# Altium PCB Glucometer-I.C.- RF Module.PcbDoc
Units mm, origin at the board's own origin, x right, y up, seen from the top; angles counter-clockwise.
Board outline 26.75 x 29.45 mm, 2 copper layers (Top Layer, Bottom Layer); 2 components, 9 nets, 21 pads, 0 vias.
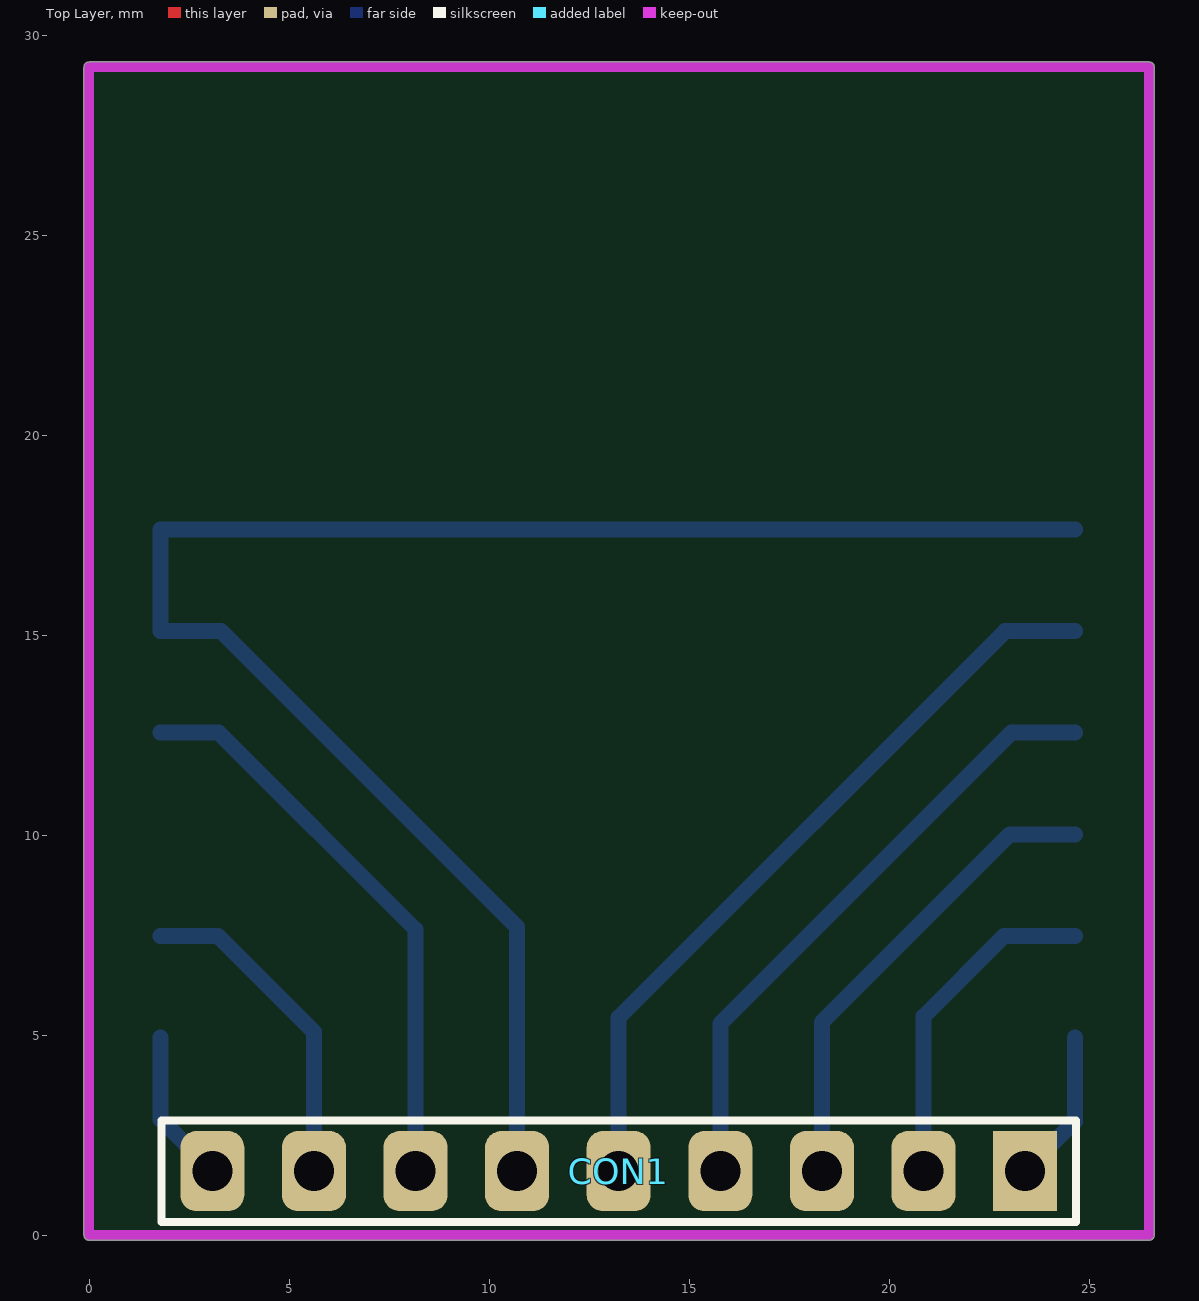
[diagram p0: Top Layer view]
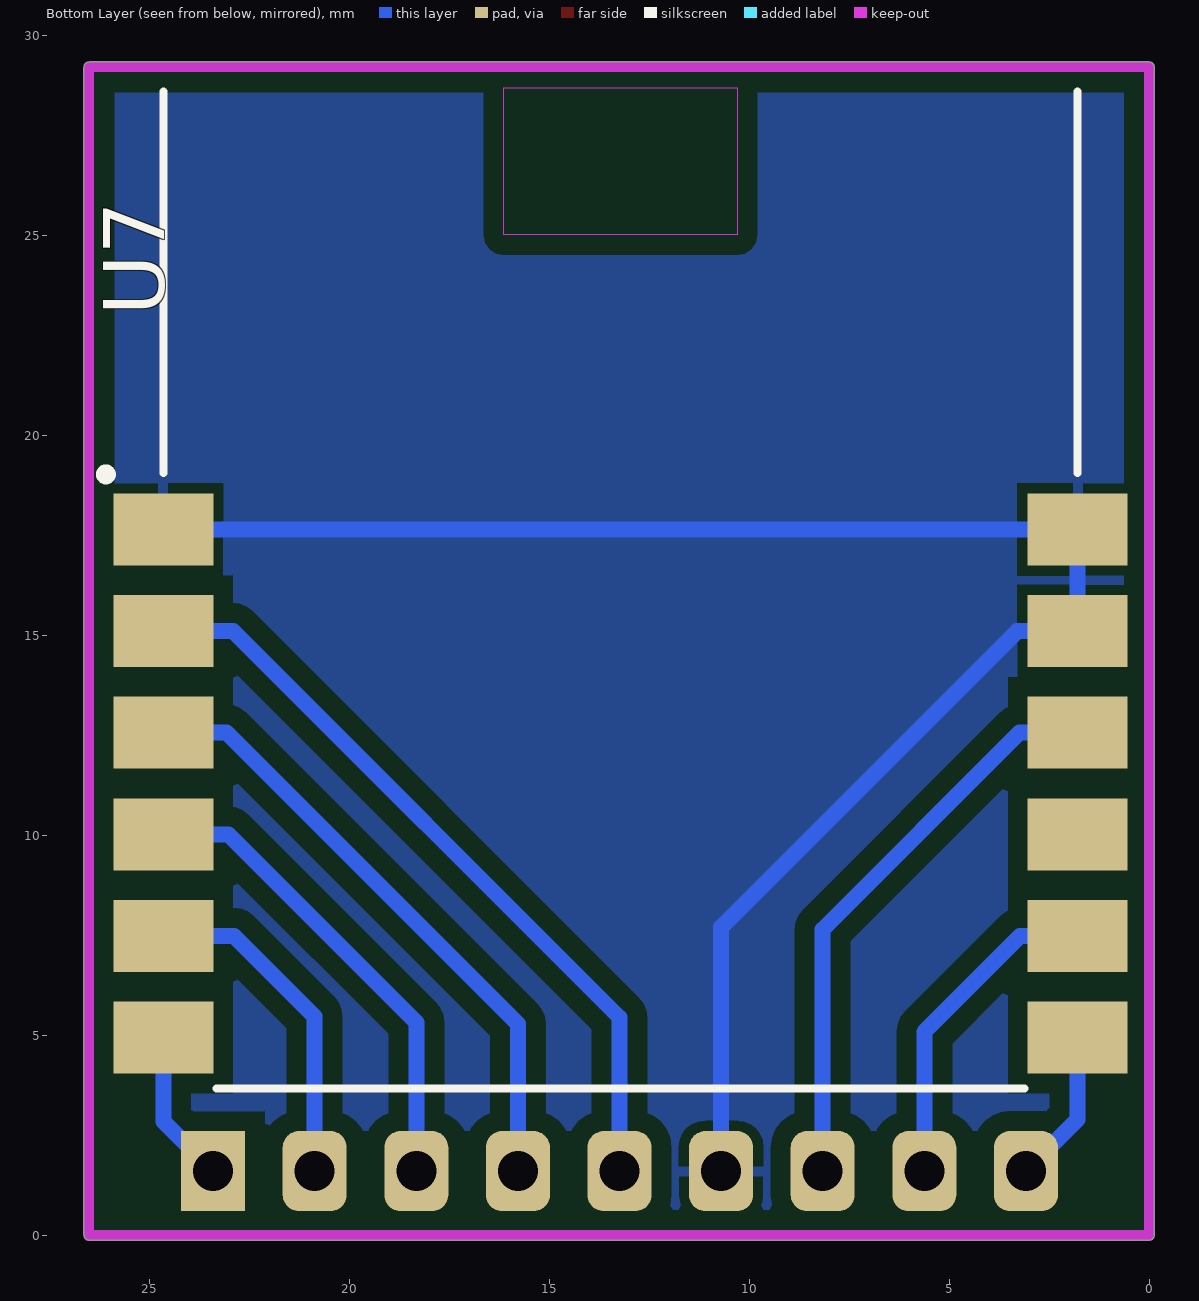
[diagram p1: Bottom Layer view, seen from below]

## Layer stack, top to bottom
Top Layer: signal copper 0.0356
Dielectric: dielectric 0.32, FR-4, Dk 4.8
Bottom Layer: signal copper 0.0356

## Board outline
-0.127,0 ccw(c0,0) 0,-0.127 26.5,-0.127 ccw(c26.5,0) 26.627,0 26.627,29.2 ccw(c26.5,29.2) 26.5,29.327 0,29.327 ccw(c0,29.2) -0.127,29.2

## Design rules (kind name [scope] priority, off if disabled: settings)
Clearance [All] p1: gap=0.3
PolygonConnect [All] p1: connectstyle=Relief reliefconductorwidth=0.254 reliefentries=4 polygonreliefangle="90 Angle" airgapwidth=0.254
RoutingVias [All] p1: holewidth=0.711 width=1.27 viastyle="Through Hole" minholewidth=0.711 minwidth=1.27 maxholewidth=0.711 maxwidth=1.27
SolderMaskExpansion [All] p1: expansion=0.102
Width [All] p1: maxlimit=5 minlimit=0.25 preferedwidth=0.3 minimp=50.000000 maximp=50.000000 favimp=50.000000
28 further rules are at their usual default settings.

## Components (designator, comment, footprint, x,y, rotation, side; value= is the part's Value field where it differs from the comment)
CON1 "Header 9" HDR1X9 23.4,1.6 r180 top
U7 "MRF24J40MB-I/RM" MRF24J40MB 13.216,28.688 r180 bottom

## Footprints (in the part's own frame and the unit in brackets; to place one, negate y for a bottom-side part, rotate by r counter-clockwise, add the part's x,y. Pads: shape width x height; smd on the part's side, far side on the other; paste and mask are expansions set on the pad)
HDR1X9 [mm] "Connector; Header; 9 Position"
  rect 1.6x2 hole 1: 1(0,0)
  rrect50% 1.6x2 hole 1: 2(2.54,0) 3(5.08,0) 4(7.62,0) 5(10.16,0) 6(12.7,0) 7(15.24,0) 8(17.78,0) 9(20.32,0)
  silkscreen extent -1.27,-1.27 21.59,1.27
MRF24J40MB [mm] "SM Module; 12 Leads; Body 33x22.9x2.5mm (LxWxH), Microchip Recommended"
  rect 2.5x1.8 smd paste-4.05 mask+0.051: 1(-11.43,-11.049) 2(-11.43,-13.589) 3(-11.43,-16.129) 4(-11.43,-18.669) 5(-11.43,-21.209) 6(-11.43,-23.749) 7(11.43,-23.749) 8(11.43,-21.209) 9(11.43,-18.669) 10(11.43,-16.129) 11(11.43,-13.589) 12(11.43,-11.049)
  Top Layer keep-out region: -2.921,0 2.921,0 2.921,-3.683 -2.921,-3.683
  silkscreen extent -12.99,-25.02 11.43,-0.1, body extent -11.43,-25.02 11.43,8, height 2.54

## Part data
CON1: "Header, 9-Pin"
U7: "2.4 GHz IEEE Std. 802.15.4, 20 dBm RF Transceiver 12-Pin Module, Industrial Temperature"

## Nets (pads, with @x,y where several pads share a name; then routed paths per layer and width w, separated by ;. In a path a pad name is that pad's centre, name@x,y a point inside that pad or via, vN(x,y) a via of type N, cw(c..) or ccw(c..) an arc to the next point about the centre after c; other vN are vias at no path point)
3.3V: CON1.7 U7.10 | length 14.5
  Bottom Layer w0.4: U7.10 3.241,12.559 8.16,7.64 CON1.7
GND: CON1.6 U7.1 U7.11 U7.12 | length 43.5
  Bottom Layer w0.4: CON1.6 10.7,7.7 3.301,15.099 U7.11 U7.12 U7.1
NetCON1_1: CON1.1 U7.6 | length 3.9
  Bottom Layer w0.4: CON1.1 24.646,2.846 U7.6
NetCON1_2: CON1.2 U7.5 | length 8.5
  Bottom Layer w0.4: CON1.2 20.86,5.46 22.879,7.479 U7.5
NetCON1_3: CON1.3 U7.4 | length 12
  Bottom Layer w0.4: CON1.3 18.32,5.32 23.019,10.019 U7.4
NetCON1_4: CON1.4 U7.3 | length 15.6
  Bottom Layer w0.4: CON1.4 15.78,5.28 23.059,12.559 U7.3
NetCON1_5: CON1.5 U7.2 | length 19.2
  Bottom Layer w0.4: CON1.5 13.24,5.44 22.899,15.099 U7.2
NetCON1_8: CON1.8 U7.8 | length 8.3
  Bottom Layer w0.4: U7.8 3.221,7.479 5.62,5.08 CON1.8
NetCON1_9: CON1.9 U7.7 | length 3.9
  Bottom Layer w0.4: U7.7 1.786,2.894 CON1.9
pads on no net: U7.9

## Polygon pours and split planes (outlines as drawn)
GND on Bottom Layer "Bottom Layer-No Net" (solid, pour order 5): 0,29.2 26.5,29.2 26.5,0 0,0

## Keep-outs
Keep-Out Layer:
  lines w0.254: 0,0 0,29.2 26.5,29.2 26.5,0 0,0